# Altium PCB PCB_Source_IoT.PcbDoc (part 2 of 2)
Units mil, origin at the board's own origin, x right, y up, seen from the top; angles counter-clockwise.
Board outline 6000 x 4000 mil, 2 copper layers (Top Layer, Bottom Layer), stack 61.855 mil thick; 59 components, 29 nets, 125 pads, 0 vias.
Unrouted connection lines stored in the file: 95.
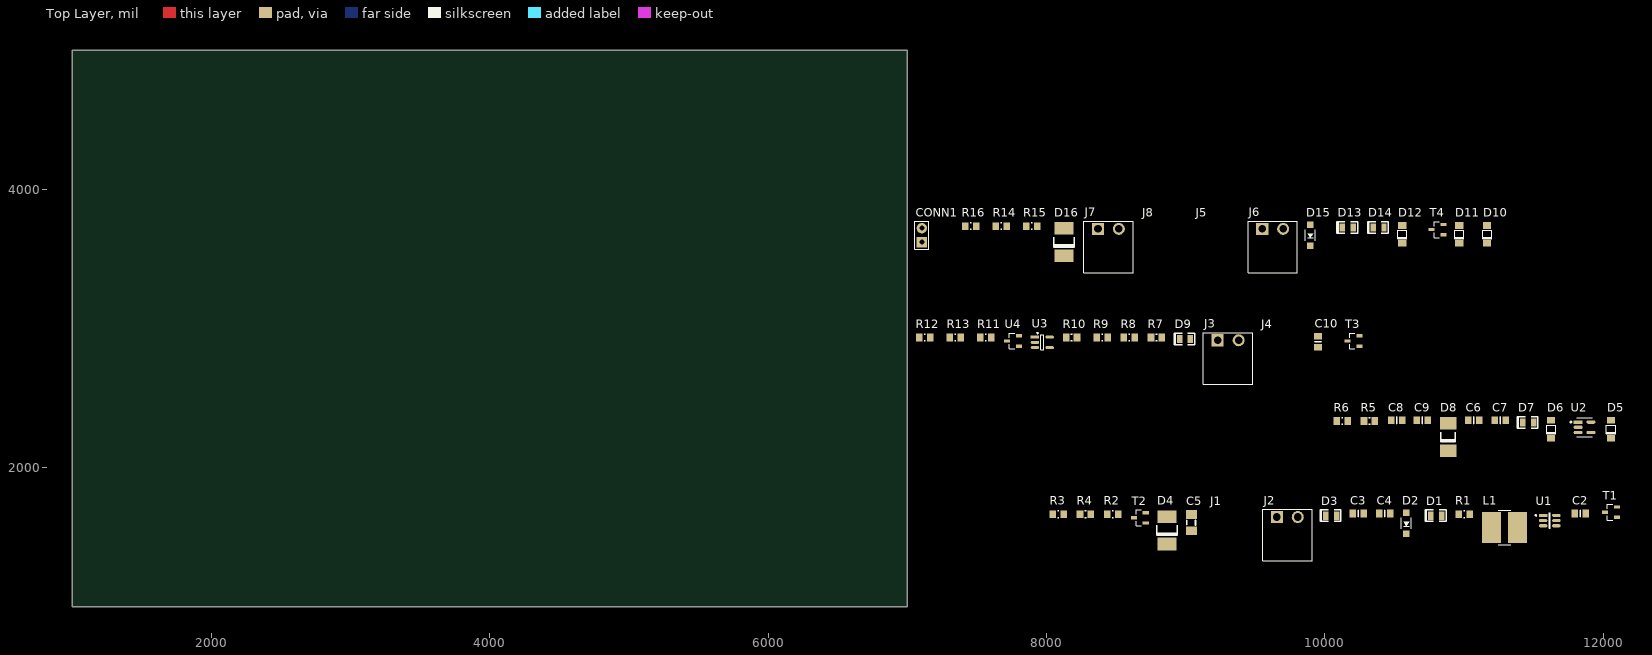
[diagram p0: Top Layer view]

## Part data (continued)
R12: "RES 16K OHM 1% 1/8W 0805", Case Code (Imperial)=0805, Case Code (Metric)=2012, Manufacturer=Yageo, Max Operating Temperature=155°C, Max Power Dissipation=125mW, Min Operating Temperature=-55°C, Package Quantity=1, Supplier Part Number=311-16.0KCRCT-ND, Temperature Coefficient=100ppm/°C, Tolerance=1%, Voltage Rating=150V, Case/Package=0805, Category="Chip SMD Resistors", ComponentLink1Description=https://datasheet.ciiva.com/2457/pyu-r-int-thick-7-2457554.pdf?src-supplier=Digikey, ComponentLink1URL=https://datasheet.ciiva.com/2457/pyu-r-int-thick-7-2457554.pdf?src-supplier=Digikey, ComponentLink2Description=https://datasheet.ciiva.com/2457/pyu-r-int-thick-7-2457555.pdf?src-supplier=Digikey, ComponentLink2URL=https://datasheet.ciiva.com/2457/pyu-r-int-thick-7-2457555.pdf?src-supplier=Digikey, ComponentLink3Description=https://datasheet.ciiva.com/2457/pyu-r-int-thick-7-2457556.pdf?src-supplier=Digikey, ComponentLink3URL=https://datasheet.ciiva.com/2457/pyu-r-int-thick-7-2457556.pdf?src-supplier=Digikey, ComponentLink4Description=https://datasheet.ciiva.com/16744/rc0805-16744799.pdf?src-supplier=Future+Electronics, ComponentLink4URL=https://datasheet.ciiva.com/16744/rc0805-16744799.pdf?src-supplier=Future+Electronics, ComponentLink5Description=https://datasheet.ciiva.com/15189/getdatasheetpartid-327975-15189909.pdf?src-supplier=Verical, ComponentLink5URL=https://datasheet.ciiva.com/15189/getdatasheetpartid-327975-15189909.pdf?src-supplier=Verical, Construction=Rectangular, Depth=1.25mm, Features="Moisture Resistant", Height=0.024inch, Lead Free="Lead Free", Length=0.079inch, Manufacturer Part Number=RC0805FR-0716KL, Military Standard=Not, Number of Terminations=2, Packaging="Tape and Reel", Power Rating=125mW, Pricing="1=0,1, 10=0,026, 50=0,0162, 100=0,0136, 500=0,00932, 1000=0,00805 (USD)", RoHS=Yes, RoHS Compliant=Yes, Series=RC, Stock=164068, Supplier=Digikey, Supplier 1=Digikey, Supplier 2=Mouser, Supplier Part Number 1=311-16.0KCRCT-ND, Supplier Part Number 2=603-RC0805FR-0716KL, Termination=SMD/SMT, Voltage Rating (DC)=150V, Width=0.049inch
R13: "RES 330K OHM 1% 1/8W 0805", Case Code (Imperial)=0805, Case Code (Metric)=2012, Manufacturer=Yageo, Max Operating Temperature=155°C, Min Operating Temperature=-55°C, Power Rating=125mW, Supplier Part Number=13-RC0805FR-13330KLCT-ND, Temperature Coefficient=100ppm/°C, Tolerance=1%, Voltage Rating=150V, Case/Package=0805, Category="Chip SMD Resistors", ComponentLink1Description=http://www.mouser.com/ds/2/447/Yageo_08112016_RC0805-968729.pdf?src-supplier=Mouser, ComponentLink1URL=http://www.mouser.com/ds/2/447/Yageo_08112016_RC0805-968729.pdf?src-supplier=Mouser, ComponentLink2Description=http://www.yageo.com/documents/recent/PYu-RC_Group_51_RoHS_L_2.pdf?src-supplier=Avnet, ComponentLink2URL=http://www.yageo.com/documents/recent/PYu-RC_Group_51_RoHS_L_2.pdf?src-supplier=Avnet, ComponentLink3Description=https://datasheet.octopart.com/RC0805FR-13330KL-Yageo-datasheet-164759695.pdf?src-supplier=Future+Electronics, ComponentLink3URL=https://datasheet.octopart.com/RC0805FR-13330KL-Yageo-datasheet-164759695.pdf?src-supplier=Future+Electronics, Contact Plating=Tin,Matte, Height=0.5mm, Length=2mm, Manufacturer Part Number=RC0805FR-13330KL, Packaging="Tape and Reel", Pricing="1=0,1, 10=0,025, 50=0,016, 100=0,0133, 500=0,00912, 1000=0,00787, 5000=0,00577, 10000=0,00511 (USD)", RoHS=Yes, RoHS Compliant=Yes, Series=RC, Stock=27015, Supplier=Digikey, Supplier 1=Digikey, Supplier 2=Mouser, Supplier Part Number 1=13-RC0805FR-13330KLCT-ND, Supplier Part Number 2=603-RC0805FR-13330KL, Termination=SMD/SMT, Width=1.25mm
T1 T4: "MOSFET P-CH 40V 2.4A SOT23", Case/Package=SOT-23, Continuous Drain Current (ID)=2.4A, Drain to Source Breakdown Voltage=-40V, Drain to Source Resistance=64mR, Drain to Source Voltage (Vdss)=40V, Gate to Source Voltage (Vgs)=20V, Input Capacitance=587pF, Manufacturer=Diodes, Max Operating Temperature=150°C, Max Power Dissipation=720mW, Min Operating Temperature=-55°C, Supplier Part Number=DMP4065S-7DICT-ND, Category=MOSFETs, ComponentLink1Description=http://www.farnell.com/datasheets/2649034.pdf?src-supplier=Farnell, ComponentLink1URL=http://www.farnell.com/datasheets/2649034.pdf?src-supplier=Farnell, ComponentLink2Description=http://www.mouser.com/ds/2/115/DMP4065S-537770.pdf?src-supplier=Mouser, ComponentLink2URL=http://www.mouser.com/ds/2/115/DMP4065S-537770.pdf?src-supplier=Mouser, ComponentLink3Description=https://www.diodes.com/assets/Datasheets/DMP4065S.pdf?src-supplier=Digikey, ComponentLink3URL=https://www.diodes.com/assets/Datasheets/DMP4065S.pdf?src-supplier=Digikey, ComponentLink4Description=http://diodes.com/datasheets/DMP4065S.pdf?src-supplier=Avnet, ComponentLink4URL=http://diodes.com/datasheets/DMP4065S.pdf?src-supplier=Avnet, ComponentLink5Description=http://www.farnell.com/datasheets/2649034.pdf?src-supplier=Newark, ComponentLink5URL=http://www.farnell.com/datasheets/2649034.pdf?src-supplier=Newark, ComponentLink6Description=http://www.farnell.com/datasheets/2649034.pdf?src-supplier=Element14, ComponentLink6URL=http://www.farnell.com/datasheets/2649034.pdf?src-supplier=Element14, ComponentLink7Description=https://datasheet.octopart.com/DMP4065S-7-Diodes-Inc.-datasheet-129886328.pdf?src-supplier=TME, ComponentLink7URL=https://datasheet.octopart.com/DMP4065S-7-Diodes-Inc.-datasheet-129886328.pdf?src-supplier=TME, Height=1.1mm, Manufacturer Part Number=DMP4065S-7, Mounting Technology="Surface Mount", Number of Channels=1, Packaging="Cut Tape", Pins=3, Power Dissipation=720mW, Pricing="1=0,43, 10=0,302, 100=0,1523, 500=0,135, 1000=0,10506 (USD)", Rds On Max=80mR, RoHS=Yes, RoHS Compliant=Yes, Series=-, Stock=25010, Supplier=Digikey, Supplier 1=Digikey, Supplier 2=Mouser, Supplier Part Number 1=DMP4065S-7DICT-ND, Supplier Part Number 2=621-DMP4065S-7, Turn-Off Delay Time=36.3ns, Turn-On Delay Time=3.6ns
T2: "TRANS PREBIAS NPN 200MW SOT23-3", Case/Package=SOT-23-3, Collector Emitter Breakdown Voltage=50V, Collector-emitter Voltage-Max=300mV, Continuous Collector Current=100mA, Emitter Base Voltage (VEBO)=30V, JLCPCB Part=C508183, Manufacturer=Diodes, Max Operating Temperature=150°C, Max Power Dissipation=200mW, Min Operating Temperature=-55°C, Package Quantity=3000, Supplier Part Number 1=DDTC143ZCA-FDICT-ND, Transition Frequency=250MHz, Category=BJTs, Collector Emitter Voltage (VCEO)=50V, ComponentLink1Description=http://www.mouser.com/ds/2/115/ds30330-71322.pdf?src-supplier=Mouser, ComponentLink1URL=http://www.mouser.com/ds/2/115/ds30330-71322.pdf?src-supplier=Mouser, ComponentLink2Description=http://www.alliedelec.com/m/d/be0b5f6f3c5081911d08f51c92d34358.pdf?src-supplier=Allied+Electronics, ComponentLink2URL=http://www.alliedelec.com/m/d/be0b5f6f3c5081911d08f51c92d34358.pdf?src-supplier=Allied+Electronics, ComponentLink3Description=http://uk.rs-online.com/webdocs/1321/0900766b81321d3c.pdf?src-supplier=RSComponents, ComponentLink3URL=http://uk.rs-online.com/webdocs/1321/0900766b81321d3c.pdf?src-supplier=RSComponents, ComponentLink4Description=http://components.arrow.com/part/dataview/41508542S9348013N2867?src-supplier=Arrow+Electronics, ComponentLink4URL=http://components.arrow.com/part/dataview/41508542S9348013N2867?src-supplier=Arrow+Electronics, ComponentLink5Description=http://www.diodes.com//datasheets/ds30330.pdf?src-supplier=Avnet, ComponentLink5URL=http://www.diodes.com//datasheets/ds30330.pdf?src-supplier=Avnet, ComponentLink6Description=http://www.diodes.com/_files/datasheets/ds30330.pdf?src-supplier=Future+Electronics, ComponentLink6URL=http://www.diodes.com/_files/datasheets/ds30330.pdf?src-supplier=Future+Electronics, ComponentLink7Description=https://www.diodes.com/assets/Datasheets/ds30330.pdf?src-supplier=Digi-Key, ComponentLink7URL=https://www.diodes.com/assets/Datasheets/ds30330.pdf?src-supplier=Digi-Key, Current Rating=100mA, Element Configuration=Single, Height=1mm, hFE Min=80, Lead Free="Lead Free", Length=3.05mm, Manufacturer Part Number=DDTC143ZCA-7-F, Max Breakdown Voltage=50V, Max Collector Current=100mA, Max Output Current=100mA, Mount="Surface Mount", Number of Pins=3, Operating Supply Voltage=50V, Packaging="Tape and Reel", Polarity=NPN, Pricing 1="1=0,20000, 10=0,18400, 100=0,10000, 500=0,06156, 1000=0,04198 (USD)", Radiation Hardening=No, RoHS=Yes, RoHS Compliant=Yes, Series=-, Stock 1=1278422, Supplier 1=Digi-Key, Supplier 2=Mouser, Supplier 3="Arrow Electronics", Supplier 4=Digi-Key, Supplier 5=Mouser, Supplier 6=Digi-Key, Supplier 7=Mouser, Supplier Part Number 2=621-DDTC143ZCA-F, Supplier Part Number 3=DDTC143ZCA-7-F, Supplier Part Number 4=1727-3045-1-ND, Supplier Part Number 5=771-PDTC143ZT-/T3, Supplier Part Number 6=MUN2233T1GOSCT-ND, Supplier Part Number 7=863-MUN2233T1G, Voltage Rating (DC)=50V, Weight=0.000282oz, Width=1.4mm
T3: "MOSFET P-CHANNEL 20V 4A SOT23", JLCPCB Part=C391636, Manufacturer="Pan Jit", Supplier Part Number 1=3757-PJA3415_R1_00001CT-ND, Manufacturer Part Number=PJA3415_R1_00001, Pricing 1="1=0,40000, 10=0,30100, 100=0,17040, 500=0,11286, 1000=0,08653 (USD)", RoHS=Yes, RoHS Compliant=Yes, Stock 1=8995, Supplier 1=Digikey, Supplier 2=Mouser, Supplier Part Number 2=241-PJA3415_R1_00001
U1: "IC REG BUCK 5V 2A TSOT23-6", Manufacturer=Diodes, Max Operating Temperature=85°C, Max Supply Voltage=32V, Min Operating Temperature=-40°C, Min Supply Voltage=3.8V, Nominal Supply Current=22uA, Output Current=2A, Output Voltage=5V, Supplier Part Number=AP63205WU-7DICT-ND, Switching Frequency=1.1MHz, Category="Voltage Regulators - Switching", ComponentLink1Description=https://www.diodes.com/assets/Datasheets/AP63200-AP63201-AP63203-AP63205.pdf?src-supplier=Digikey, ComponentLink1URL=https://www.diodes.com/assets/Datasheets/AP63200-AP63201-AP63203-AP63205.pdf?src-supplier=Digikey, Height=1mm, Manufacturer Part Number=AP63205WU-7, Max Duty Cycle=100%, Number of Outputs=1, Pricing="1=1,32, 10=0,831, 25=0,7008, 100=0,5531, 250=0,4808, 500=0,43652, 1000=0,39967 (USD)", RoHS=Yes, Stock=18105, Supplier=Digikey, Supplier 1=Digikey, Supplier 2=Mouser, Supplier Part Number 1=AP63205WU-7DICT-ND, Supplier Part Number 2=621-AP63205WU-7
U2: "IC BATT CNTL LI-ION 1CEL SOT23-5", Battery Pack Voltage=4.2V, Case/Package=SOT-23, Drain to Source Resistance=350mR, Manufacturer=Microchip, Max Charge Current=500mA, Max Operating Temperature=85°C, Max Output Voltage=4.5V, Max Power Dissipation=1.54W, Max Supply Voltage=6V, Min Operating Temperature=-40°C, Min Output Voltage=4.168V, Min Supply Voltage=3.75V, Supplier Part Number=MCP73831T-2ACI/OTCT-ND, Voltage Rating=4.534V, Category="Battery Management", ComponentLink1Description=https://datasheet.ciiva.com/22828/0900766b80d2b53a-22828876.pdf?src-supplier=Rs, ComponentLink1URL=https://datasheet.ciiva.com/22828/0900766b80d2b53a-22828876.pdf?src-supplier=Rs, ComponentLink2Description=https://datasheet.ciiva.com/26344/651521-da-01-en-contr-mcp73831t-2aci-ot-sot-23-5-mcp-26344458.pdf?src-supplier=Conrad, ComponentLink2URL=https://datasheet.ciiva.com/26344/651521-da-01-en-contr-mcp73831t-2aci-ot-sot-23-5-mcp-26344458.pdf?src-supplier=Conrad, ComponentLink3Description=https://datasheet.ciiva.com/1931/21984e-1931953.pdf?src-supplier=Digikey, ComponentLink3URL=https://datasheet.ciiva.com/1931/21984e-1931953.pdf?src-supplier=Digikey, ComponentLink4Description=https://datasheet.ciiva.com/1931/21984e-1931954.pdf?src-supplier=Digikey, ComponentLink4URL=https://datasheet.ciiva.com/1931/21984e-1931954.pdf?src-supplier=Digikey, ComponentLink5Description=https://datasheet.ciiva.com/1931/21984e-1931955.pdf?src-supplier=Digikey, ComponentLink5URL=https://datasheet.ciiva.com/1931/21984e-1931955.pdf?src-supplier=Digikey, ComponentLink6Description=https://datasheet.ciiva.com/3213/21984e-3213404.pdf?src-supplier=Avnet, ComponentLink6URL=https://datasheet.ciiva.com/3213/21984e-3213404.pdf?src-supplier=Avnet, ComponentLink7Description=https://datasheet.ciiva.com/28626/630369-28626439.pdf?src-supplier=Element14, ComponentLink7URL=https://datasheet.ciiva.com/28626/630369-28626439.pdf?src-supplier=Element14, ComponentLink8Description=https://datasheet.ciiva.com/46385/630369-46385324.pdf?src-supplier=Element14, ComponentLink8URL=https://datasheet.ciiva.com/46385/630369-46385324.pdf?src-supplier=Element14, ComponentLink9Description=https://datasheet.ciiva.com/1137/630369-1137803.pdf?src-supplier=Element14, ComponentLink9URL=https://datasheet.ciiva.com/1137/630369-1137803.pdf?src-supplier=Element14, ComponentLink10Description=https://datasheet.ciiva.com/1144/630369-1144461.pdf?src-supplier=Newark, ComponentLink10URL=https://datasheet.ciiva.com/1144/630369-1144461.pdf?src-supplier=Newark, ComponentLink11Description=https://datasheet.ciiva.com/16286/filehandler-aspxddocname-en025112-16286957.pdf?src-supplier=Future+Electronics, ComponentLink11URL=https://datasheet.ciiva.com/16286/filehandler-aspxddocname-en025112-16286957.pdf?src-supplier=Future+Electronics, Fault Protection="Over Voltage", Height=1.3mm, Lead Free="Lead Free", Length=3.1mm, Manufacturer Part Number=MCP73831T-2ACI/OT, Mounting Technology="Surface Mount", Number of Cells=1, Number of Channels=1, Number of Outputs=1, Output Current=500mA, Output Voltage=4.2V, Packaging="Tape and Reel", Pins=5, Pricing="1=0,76, 25=0,63, 100=0,6125 (USD)", Radiation Hardening=No, Reach SVHC Compliant=No, RoHS=Yes, RoHS Compliant=Yes, Series=-, Stock=95605, Supplier=Digikey, Supplier 1=Digikey, Supplier 2=Mouser, Supplier Part Number 1=MCP73831T-2ACI/OTCT-ND, Supplier Part Number 2=579-MCP73831T-2ACIOT, Termination=SMD/SMT, Weight=0.00709oz, Width=1.8mm
U3: "AUTOMOTIVE NANO POWER COMPARATOR", JLCPCB Part=C3658921, Manufacturer="Texas Instruments", Supplier Part Number 1=296-TLV7031QDBVRQ1CT-ND, Manufacturer Part Number=TLV7031QDBVRQ1, Pricing 1="1=0,96000, 10=0,86000, 25=0,81600, 100=0,67040, 250=0,62672, 500=0,55384, 1000=0,48125 (USD)", RoHS=No, RoHS Compliant=Yes, Stock 1=2000, Supplier 1=Digi-Key, Supplier 2=Mouser, Supplier Part Number 2=595-TLV7031QDBVRQ1
U4: "IC VREF SHUNT 1% SOT23-3", Case/Package=TO-236-3, Cathode Current=70uA, Manufacturer=Microchip, Max Operating Temperature=85°C, Min Operating Temperature=-40°C, Min Output Voltage=1.225V, Output Current=12mA, Supplier Part Number 1=576-2572-1-ND, Temperature Coefficient=150ppm/°C, Tolerance=1%, Category="Voltage References", ComponentLink1Description=https://datasheet.ciiva.com/16221/lm4040-16221709.pdf?src-supplier=Future+Electronics, ComponentLink1URL=https://datasheet.ciiva.com/16221/lm4040-16221709.pdf?src-supplier=Future+Electronics, Manufacturer Part Number=LM4041DYM3-1.2-TR, Mount="Surface Mount", Output Type=Fixed, Packaging="Tape and Reel", Pricing 1="1=0,36000, 25=0,30760, 100=0,27560 (USD)", Reference Type=Shunt, RoHS=Yes, Stock 1=2876, Supplier 1=Digi-Key, Supplier 2=Mouser, Supplier Part Number 2=998-LM4041DYM3-1.2TR

## Nets (pads, with @x,y where several pads share a name; then routed paths per layer and width w, separated by ;. In a path a pad name is that pad's centre, name@x,y a point inside that pad or via, vN(x,y) a via of type N, cw(c..) or ccw(c..) an arc to the next point about the centre after c; other vN are vias at no path point)
+3.7V: D9.2 D10.2 T3.2
+5V_Ext: C3.1 C4.1 D1.2 D5.2 D11.2 L1.2 U1.1
+5V_USB: CONN1.1 D6.2 D12.2 D13.2 D15.1 T4.2
GND: C3.2 C4.2 C5.2 C6.2 C7.2 C8.2 C9.2 C10.2 D4.2 D8.2 D16.2 J2.2 J3.2 J6.2 J7.2 R2.1 R3.2 R4.2 R5.1 R10.1 R12.1 R13.1 R14.1 R15.1 R16.2 T2.2 U1.4 U2.2 U3.2
NetC2_1: C2.1 L1.1 U1.5
NetC2_2: C2.2 U1.6
NetC5_1: C5.1 D2.1 D3.2 R1.2 T1.2 U1.3
NetC6_1: C6.1 C7.1 D5.1 D6.1 D7.2 D8.1 U2.4
NetCONN1_2: CONN1.2 T2.1
NetD1_1: D1.1 R2.2
NetD2_2: D2.2 R3.1 T1.1
NetD3_1: D3.1 R4.1
NetD7_1: D7.1 R6.1
NetD9_1: D9.1 R10.2
NetD13_1: D13.1 R14.2
NetD14_1: D14.1 R15.2
NetD15_2: D15.2 R16.1 T4.1
NetR1_1: R1.1 T2.3 U1.2
NetR5_2: R5.2 U2.5
NetR6_2: R6.2 U2.1
NetR7_1: R7.1 R13.2 U3.4
NetR8_1: R8.1 U3.3 U4.1
NetR9_1: R9.1 R11.2 U3.1
NetR9_2: R9.2 T3.1
NetR11_1: R11.1 R12.2 U4.2
V_Battery: C8.1 C9.1 C10.1 J3.1 R7.2 R8.2 T3.3 U2.3 U3.5
VBUS: D16.1 J6.1 T4.3
VCC: D4.1 J2.1 T1.3
VSYS: D10.1 D11.1 D12.1 D14.2 J7.1
pads on no net: U4.3